# Altium PCB PCB1.PcbDoc
Units mil, origin at the board's own origin, x right, y up, seen from the top; angles counter-clockwise.
Board outline 1003.94 x 708.66 mil, 2 copper layers (Top Layer, Bottom Layer); 22 components, 19 nets, 111 pads, 42 vias.
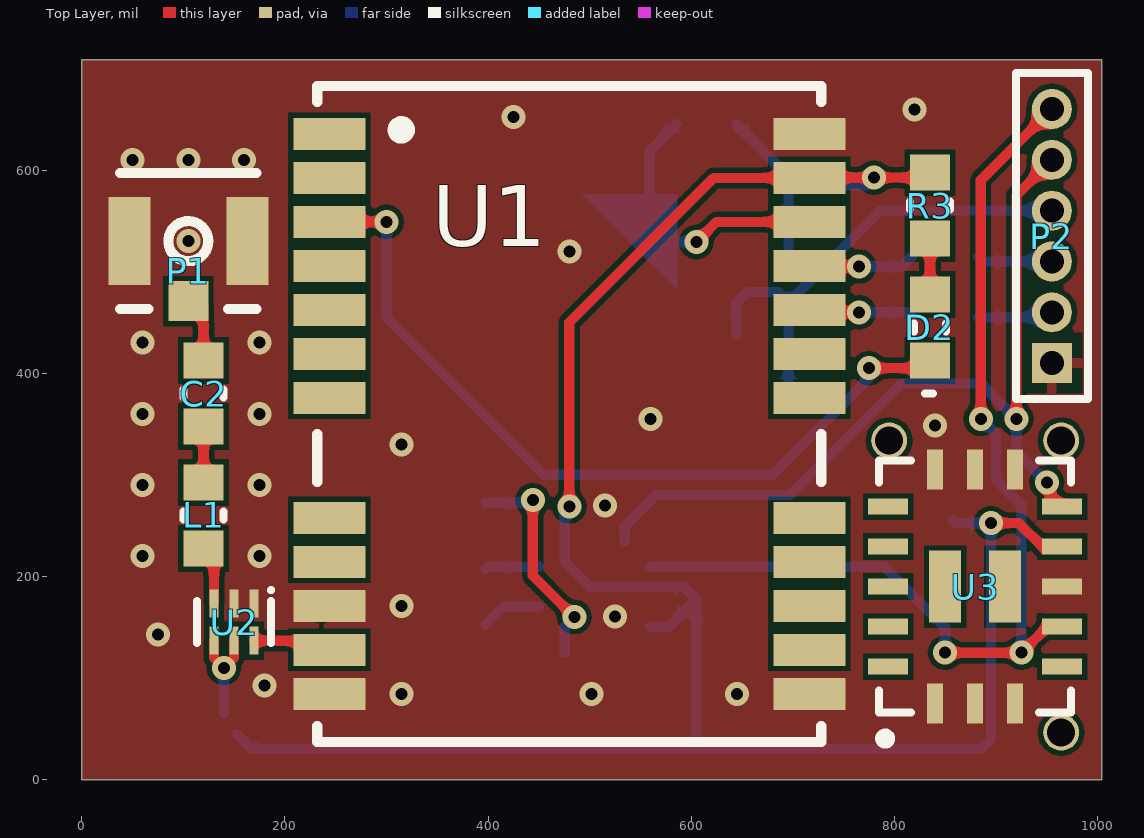
[diagram p0: Top Layer view]
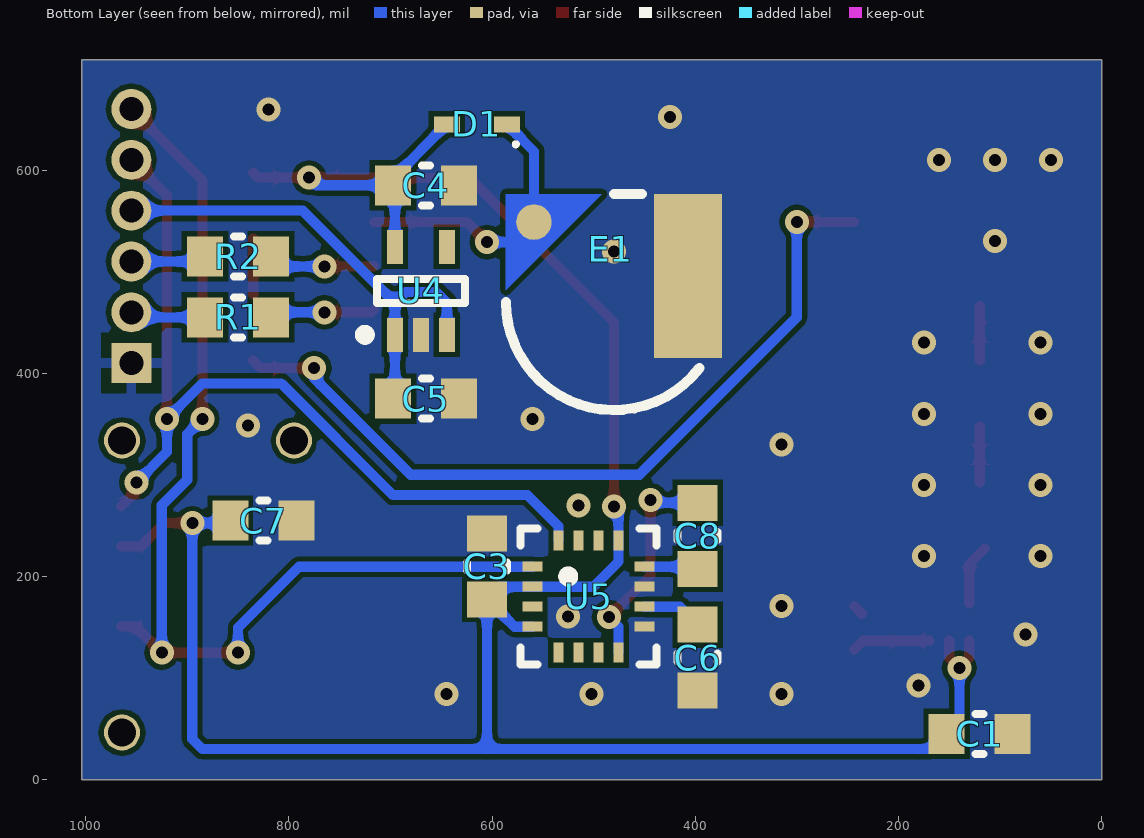
[diagram p1: Bottom Layer view, seen from below]
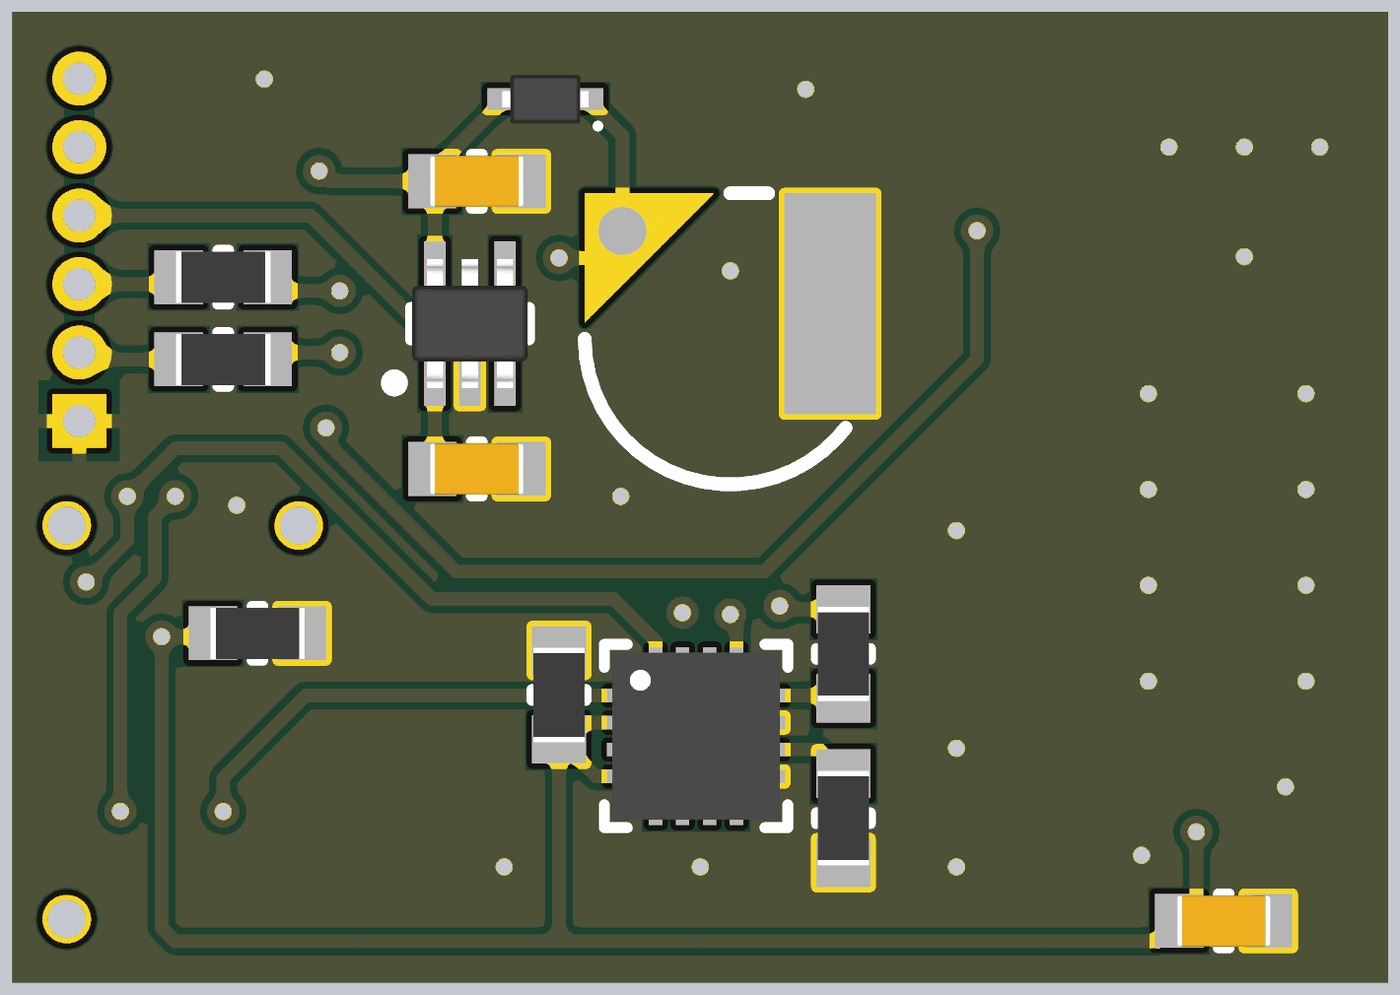
[diagram p2: 3D render of the assembled board from below, using the file's embedded part models]

## Layer stack, top to bottom
Top Solder: solder mask 0.4, Solder Resist, Dk 3.5
Top Layer: signal copper 1.4
Dielectric 1: dielectric 12.6, FR-4, Dk 4.8
Bottom Layer: signal copper 1.4
Bottom Solder: solder mask 0.4, Solder Resist, Dk 3.5

## Board outline
0,0 0,708.66 1003.94,708.66 1003.94,0

## Design rules (kind name [scope] priority, off if disabled: settings)
Clearance [All] p1: gap=5 ignorepadtopadclearanceinfootprint=FALSE
PolygonConnect [All] p1: thpad.connectstyle=Relief thpad.reliefconductorwidth=10 thpad.reliefentries=4 thpad.polygonreliefangle="90 Angle" thpad.airgapwidth=10 smdpad.connectstyle=Direct smdpad.reliefconductorwidth=10 smdpad.reliefentries=4 smdpad.polygonreliefangle="90 Angle" smdpad.airgapwidth=10 via.connectstyle=Direct via.reliefconductorwidth=10 via.reliefentries=4 via.polygonreliefangle="90 Angle" via.airgapwidth=10
RoutingVias [All] p1: holewidth=11.81 width=23.62 viastyle="Through Hole" minholewidth=11.81 minwidth=23.62 maxholewidth=28 maxwidth=50
SolderMaskExpansion [All] p1: expansion=4
Width [All] p1: maxlimit=10 minlimit=10 preferedwidth=10
30 further rules are at their usual default settings.

## Components (designator, comment, footprint, x,y, rotation, side; value= is the part's Value field where it differs from the comment)
C1 "33nF" 0603-Cap 120,45 r0 bottom
C2 "470pF" 0603-Cap 120,380 r90 top
C3 "100nF" 0603 605,210 r90 bottom
C4 "1u" 0603-Cap 665,585 r180 bottom
C5 "1u" 0603-Cap 665,375 r0 bottom
C6 "4.7uF" 0603 397.52,120 r90 bottom
C7 "100nF" 0603 825,255 r180 bottom
C8 "0.22uF" 0603 397.52,240 r270 bottom
D1 "Diode" SOD-523 615,645 r0 bottom
D2 "LED" 0603-1 835,445 r270 top
E1 "ML414" ML-414 480,470 r90 bottom
L1 "6.8nH" 0603 120,260 r90 top
P1 "IPEX-1" IPEX-1 105,530 r0 top
P2 "MHDR1X6" MHDR1X6 955,410 r90 top
R1 "510" 0603 850,455 r180 bottom
R2 "510" 0603 850,515 r180 bottom
R3 "1k" 0603 835,565 r90 top
U1 "NEO-M9N" NEO-M9N 480,360 r180 top
U2 "MAX2659" uDFN-6 150,155 r270 top
U3 "SDP3x_D" SDP3x 879.53,190 r90 top
U4 "ME6211" SC70-5 670,481.1 r90 bottom
U5 "QMC5883L" QMC5883 505,180 r180 bottom

## Footprints (in the part's own frame and the unit in brackets; to place one, negate y for a bottom-side part, rotate by r counter-clockwise, add the part's x,y. Pads: shape width x height; smd on the part's side, far side on the other; paste and mask are expansions set on the pad)
0603 [mm]
  rect 0.9x1 smd: 1(-0.825,0) 2(0.825,0)
  silkscreen extent -0.1,-0.5 0.1,0.5, body extent -0.87,-0.48 0.88,0.48, height 0.5
0603-1 [mm]
  rect 0.9x1 smd: 1(-0.825,0) 2(0.825,0)
  silkscreen extent -0.1,-0.4 1.65,0.4
0603-Cap [mm]
  rect 0.9x1 smd: 1(-0.825,0) 2(0.825,0)
  silkscreen extent -0.1,-0.5 0.1,0.5, body extent -0.87,-0.48 0.87,0.48, height 0.5
IPEX-1 [mm]
  rect 1x1 smd: 1(0,-1.5)
  rect 1.05x2.2 smd: 2(-1.475,0) 3(1.475,0)
  silkscreen extent -1.7,-1.7 1.7,1.7
MHDR1X6 [mm] "Connector; Header; 6 Position"
  rect 1x1 hole 0.6: 1(0,0)
  round 1 hole 0.6: 2(1.27,0) 3(2.54,0) 4(3.81,0) 5(5.08,0) 6(6.35,0)
  silkscreen extent -0.9,-0.9 7.25,0.9
ML-414 [mm]
  round 0.889 smd: 1(2,2)
  rect 4.1x1.7 smd: 2(0.65,-1.85)
  Top Layer region: 0.3,2.7 2.7,2.7 2.7,0.3
  silkscreen extent -2.7,-2.14 2.7,2.7
NEO-M9N [mm]
  rect 1.8x0.8 smd: 1(6,-7) 2(6,-5.9) 3(6,-4.8) 4(6,-3.7) 5(6,-2.6) 6(6,-1.5) 7(6,-0.4) 8(6,2.6) 9(6,3.7) 10(6,4.8) 11(6,5.9) 12(6,7) 13(-6,7) 14(-6,5.9) 15(-6,4.8) 16(-6,3.7) 17(-6,2.6) 18(-6,-0.4) 19(-6,-1.5) 20(-6,-2.6) 21(-6,-3.7) 22(-6,-4.8) 23(-6,-5.9) 24(-6,-7)
  silkscreen extent -6.3,-8.2 6.3,8.2
QMC5883 [mm]
  rect 0.5x0.25 smd: 1(-1.4,0.75) 2(-1.4,0.25) 3(-1.4,-0.25) 4(-1.4,-0.75) 9(1.4,-0.75) 10(1.4,-0.25) 11(1.4,0.25) 12(1.4,0.75)
  rect 0.25x0.5 smd: 5(-0.75,-1.4) 6(-0.25,-1.4) 7(0.25,-1.4) 8(0.75,-1.4) 13(0.75,1.4) 14(0.25,1.4) 15(-0.25,1.4) 16(-0.75,1.4)
  silkscreen extent -1.7,-1.7 1.7,1.7, body extent -1.55,-1.55 1.55,1.55, height 0.95
SC70-5 [mm]
  rect 0.85x0.4 smd: 1(-1.1,0.65) 2(-1.1,0) 3(-1.1,-0.65) 4(1.1,-0.65) 5(1.1,0.65)
  silkscreen extent -1.22,-1.1 0.3,1.53, body extent -1.2,-1.08 1.2,1.07, height 1.1
SDP3x [mm] "QFN, 16-Leads, Body 6.00x4.50mm, Pitch 1.00mm, Thermal Pad 1.80x2.60mm, IPC Low Density"
  rect 1x0.4 smd: 1(-2.925,1) 2(-2.925,0) 3(-2.925,-1) 9(2.925,-1) 10(2.925,0) 11(2.925,1)
  rect 0.4x1 smd: 4(-2,-2.175) 5(-1,-2.175) 6(0,-2.175) 7(1,-2.175) 8(2,-2.175) 12(2,2.175) 13(1,2.175) 14(0,2.175) 15(-1,2.175) 16(-2,2.175)
  round 0.9 hole 0.7: ""(-3.65,-2.15) ""(3.65,-2.15) ""(3.65,2.15)
  rect 1.8x0.8 smd: ""(0,0.75) ""(0,-0.75)
  silkscreen extent -3.92,-2.4 3.15,2.4
SOD-523 [mm]
  rect 0.65x0.4 smd: 1(0.75,0) 2(-0.75,0)
  silkscreen extent -1.02,0.45 -0.93,0.55, body extent -0.8,-0.45 0.8,0.45, height 0.7
uDFN-6 [mm] "L611±2,1.5*1.0*0.75"
  rect 0.7x0.23 smd: 1(-0.465,0.5) 2(-0.465,0) 3(-0.465,-0.5) 4(0.465,-0.5) 5(0.465,0) 6(0.465,0.5)
  silkscreen extent -0.85,-0.93 0.53,0.97, body extent -0.53,-0.77 0.53,0.77, height 0.8

## Part data
C1 C2 C3 C4 C5 C6 C7 C8: library part Cap
E1: library part BAT
L1: library part Inductor
P2: "Header, 6-Pin", LatestRevisionDate=17-Jul-2002, LatestRevisionNote="Re-released for DXP Platform.", Publisher="Altium Limited"
R1 R2 R3: library part Res

## Via types
v1: diameter 23.62, hole 11.81, Top Layer to Bottom Layer, tented both sides, 42 vias

## Nets (pads, with @x,y where several pads share a name; then routed paths per layer and width w, separated by ;. In a path a pad name is that pad's centre, name@x,y a point inside that pad or via, vN(x,y) a via of type N, cw(c..) or ccw(c..) an arc to the next point about the centre after c; other vN are vias at no path point)
+5: C5.2 P2.4 U4.1 U4.3 | length 494.3
  Bottom Layer w10: U4.3 644.41,469.41 655,480 685,480 695.59,469.41 ; C5.2@700,367.52 702.48,370 C5.2 695.59,376.89 U4.1 695.59,469.41 ; P2.4 786.18,560 695.59,469.41
GND: C1.1 C3.2 C4.2 C5.1 C6.1 C7.2 E1.2 P1.2 P1.3 P2.1 U1.10 U1.12 U1.13 U1.24 U2.1 U2.2 U3.1 U3.2 U3.3 U3.6 U3.9 U3.10 U3.11 U4.2 U5.9 U5.11 | length 10.9
  Top Layer w10: U1.10@236.06,163.31 U1.10
  other v1: 315,84.41 501.97,84.41 645,84.41 180,92.86 75,142.86 525,160.56 315,171.02 60,220 175,220 515,270 60,290 175,290 315,330 840.16,348.44 560,355 60,360 175,360 60,430 175,430 480,519.63 105,530 50,610 105,610 160,610 425,652.23 820,659.65
NetC2_1: C2.1 L1.2 | length 55
  Top Layer w10: L1.2 C2.1
NetC2_2: C2.2 P1.1 | length 53.5
  Top Layer w10: C2.2 P1.1@120,465.94
NetC6_2: C6.2 U5.10 | length 59.7
  Bottom Layer w10: C6.2 415.2,170.16 U5.10
NetC8_1: C8.1 U5.8 | length 218.6
  Top Layer w10: v1(444.06,275) 444.06,200.94 v1(485,160)
  Bottom Layer w10: C8.1 441.54,272.48 v1(444.06,275) ; U5.8 475.47,150.47 v1(485,160)
NetC8_2: C8.2 U5.12 | length 53.2
  Bottom Layer w10: C8.2 399.53,209.53 U5.12
NetD1_2: D1.2 E1.1 U1.22 | length 250.9
  Top Layer w10: v1(605,529.06) 624.92,548.98 U1.22
  Bottom Layer w10: E1.1 558.74,618.27 D1.2 ; 580.94,529.06 v1(605,529.06)
NetD2_1: D2.1 R3.1 | length 55
  Top Layer w10: D2.1 R3.1
NetD2_2: D2.2 U1.3 | length 801.9
  Top Layer w10: U1.3 v1(300,548.98) ; v1(775,405) 827.48,405 D2.2
  Bottom Layer w10: v1(300,548.98) 300,455 455,300 680,300 775,395 v1(775,405)
NetL1_1: L1.1 U2.3 | length 60.6
  Top Layer w10: L1.1@115,227.52 130.31,212.2 U2.3
NetR1_2: R1.2 U1.20 | length 104.3
  Top Layer w10: U1.20 718.58,460 v1(765,460)
  Bottom Layer w10: v1(765,460) 812.52,460 R1.2
NetR2_2: R2.2 U1.21 | length 105.7
  Top Layer w10: U1.21 716.89,505 v1(765,505)
  Bottom Layer w10: v1(765,505) 807.52,505 R2.2
NetU1_11: U1.11 U2.6 | length 77.8
  Top Layer w10: U2.6 234.8,136.69 U1.11
RX: P2.3 R2.1 | length 74.6
  Bottom Layer w10: R2.1 887.48,510 P2.3
SCL: P2.6 U3.5 U5.1 | length 1045.8
  Top Layer w10: v1(850,124.88) 924.88,124.88 v1(925,125) 950.63,150.63 U3.5 ; v1(885,355) 885,590 P2.6
  Bottom Layer w10: U5.1 790,209.53 850,149.53 v1(850,124.88) ; v1(885,355) 900,340 900,295 925,270 v1(925,125)
SDA: P2.5 U3.8 U5.16 | length 847
  Top Layer w10: v1(920,355) 920,575 P2.5 ; v1(950,292.48) 950,283.9 U3.8
  Bottom Layer w10: U5.16 534.53,249.41 565.12,280 697.52,280 807.54,390.02 884.98,390.02 v1(920,355) 920,322.48 v1(950,292.48)
TX: P2.2 R1.1 | length 74.6
  Bottom Layer w10: R1.1 950,455 P2.2
VCC: C1.2 C3.1 C4.1 C7.1 D1.1 R3.2 U1.23 U2.4 U2.5 U3.7 U4.5 U5.2 U5.4 U5.13 | length 2421
  Top Layer w10: U2.4 130.31,119.69 v1(140,110) 150,120 U2.5 ; v1(480,268.74) 480,450 622.28,592.28 U1.23 716.46,592.52 v1(780,592.52) 830.04,592.52 R3.2 ; v1(895,252.48) 922.52,252.48 945.63,229.37 U3.7
  Bottom Layer w10: 140,65 v1(140,110) ; C1.2 167.48,30 605,30 ; v1(480,268.74) 475.47,264.21 U5.13 475.47,214.53 500.16,189.84 U5.2 592.68,189.84 C3.1 ; U5.4 577.95,150.47 C3.1 ; D1.1 697.48,592.05 C4.1 ; U4.5 695.59,583.11 C4.1 ; v1(780,592.52) 772.48,585 C4.1 ; C7.1 860,252.48 v1(895,252.48) 895,40 885,30 605,30 ; 605,30 C3.1
pads on no net: U1.1 U1.2 U1.4 U1.5 U1.6 U1.7 U1.8 U1.9 U1.14 U1.15 U1.16 U1.17 U1.18 U1.19 U3. U3.4 U3.12 U3.13 U3.14 U3.15 U3.16 U4.4 U5.3 U5.5 U5.6 U5.7 U5.14 U5.15

## Polygon pours and split planes (outlines as drawn)
GND on Top Layer "Top Layer-GND" (solid, pour order 2): 0,708.66 1003.94,708.66 1003.94,0 0,0
GND on Bottom Layer "Bottom Layer-GND" (solid, pour order 4): 0,708.66 1003.94,708.66 1003.94,0 0,0

## Silkscreen, mask and mechanical layers (free items; w line width, h text height)
Mechanical 1:
  the board outline again, w10